# Altium PCB SensorBoardShield_Actuator.PcbDoc (part 1 of 2)
Units mil, origin at the board's own origin, x right, y up, seen from the top; angles counter-clockwise.
Board outline 3258.19 x 2440.94 mil, 4 copper layers (Top Layer, GND, PWR, Bottom Layer), stack 22.373 mil thick; 64 components, 36 nets, 228 pads, 1194 vias.
Unrouted connection lines stored in the file: 70.
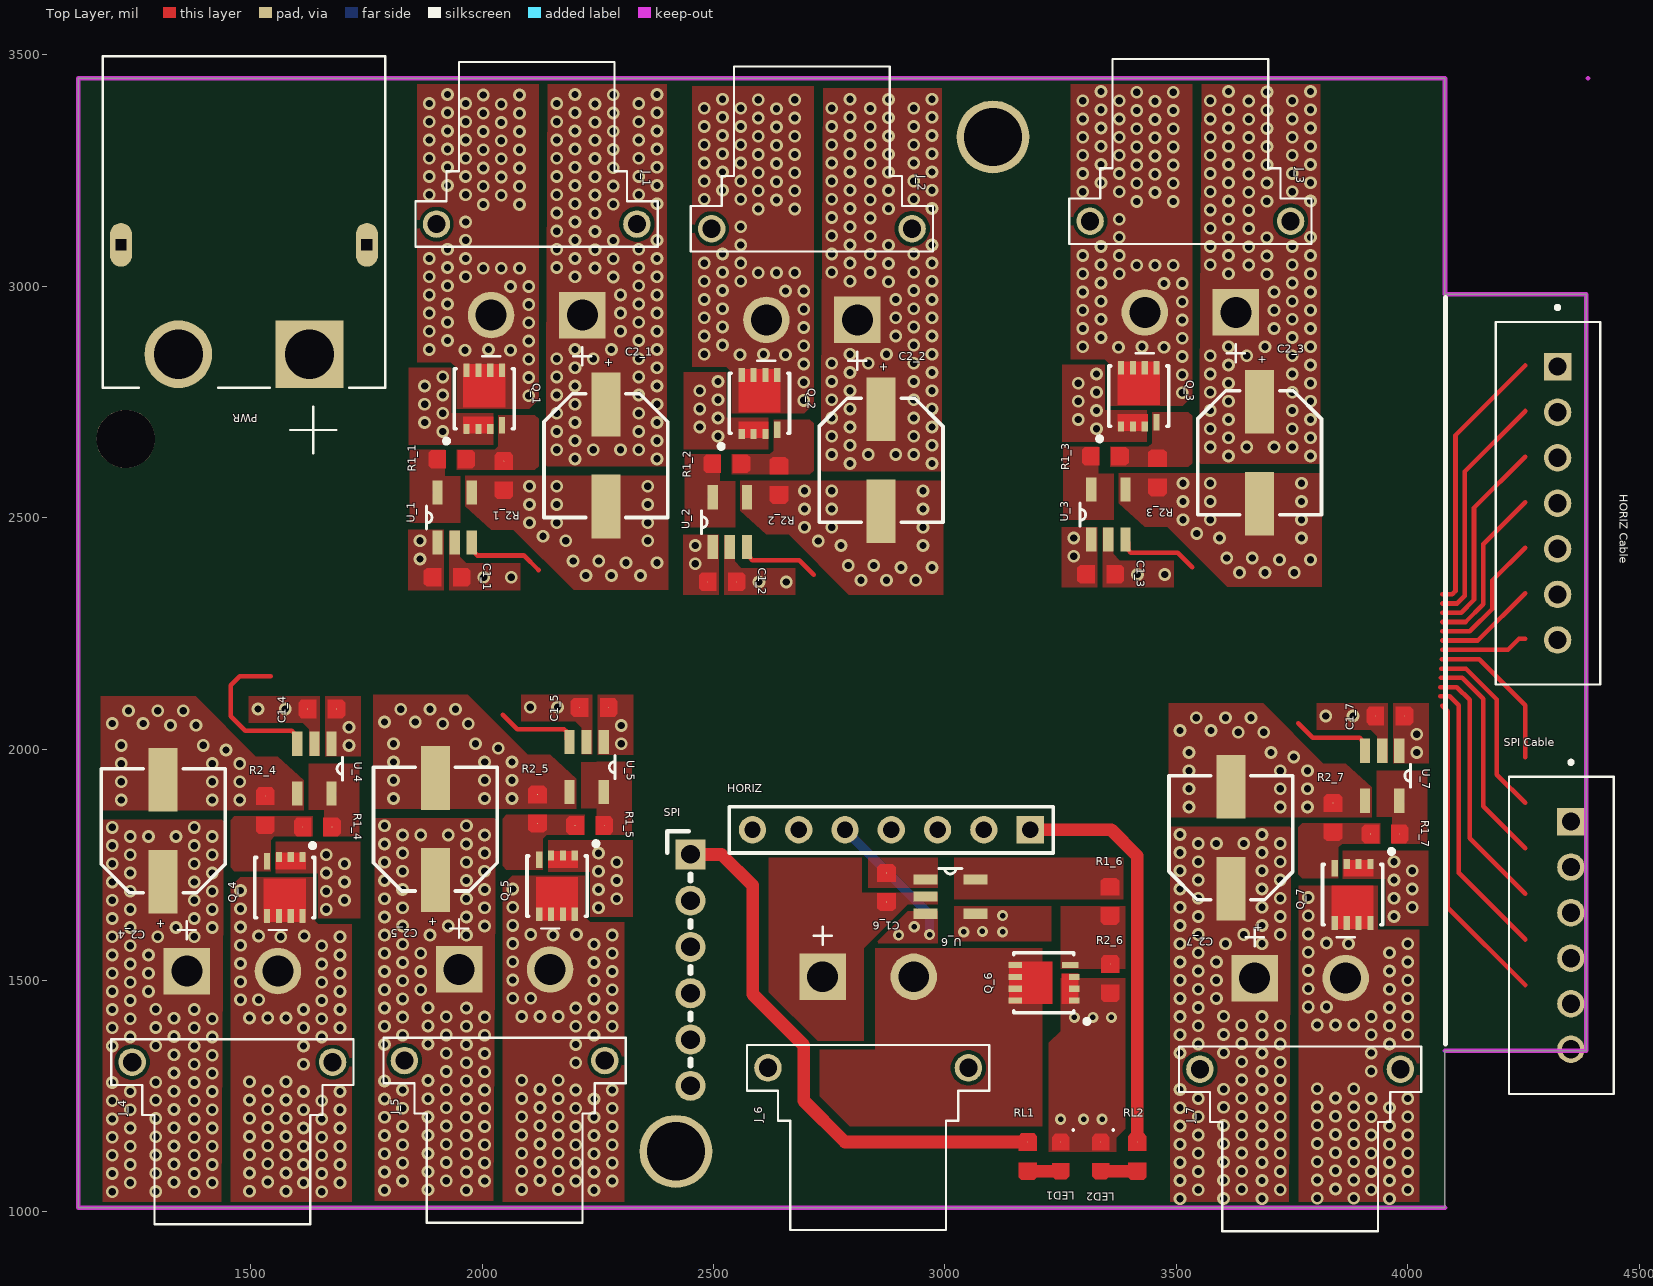
[diagram p0: Top Layer view]
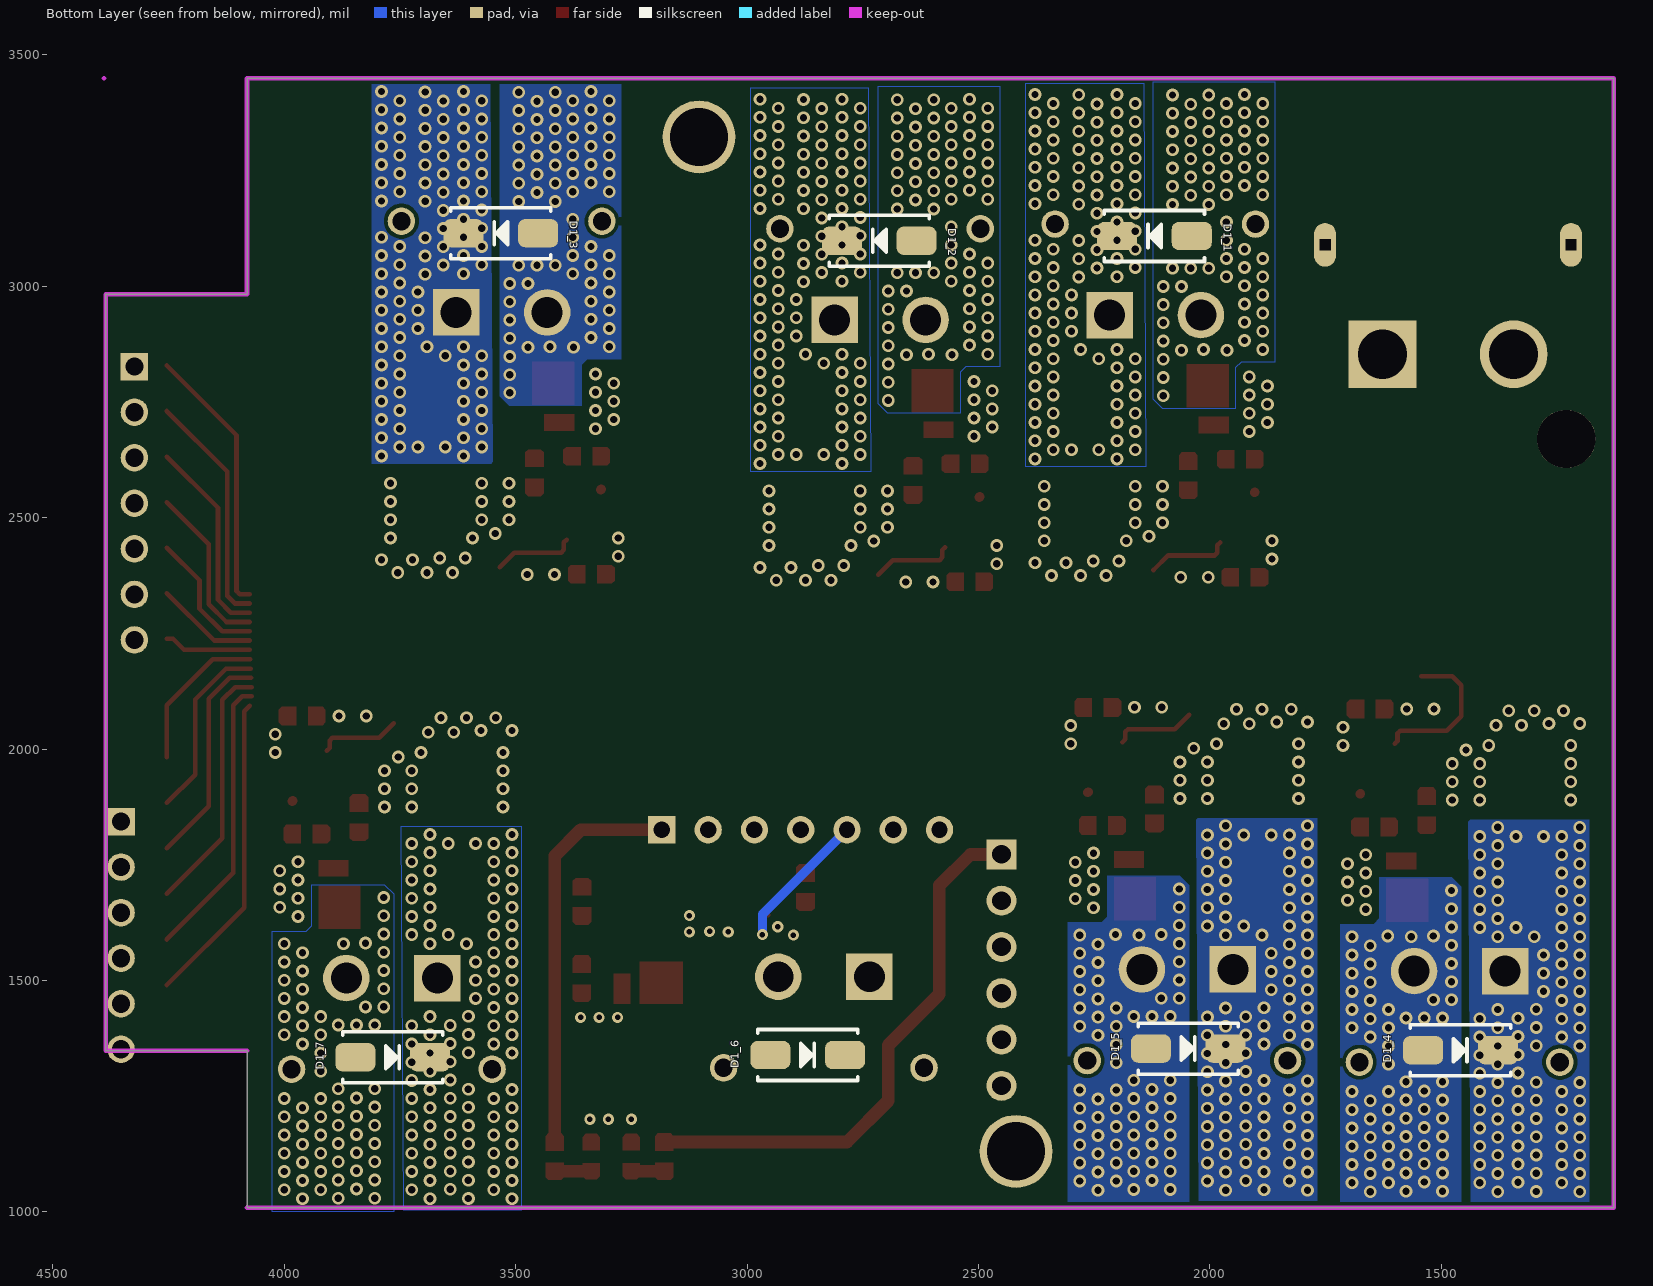
[diagram p1: Bottom Layer view, seen from below]
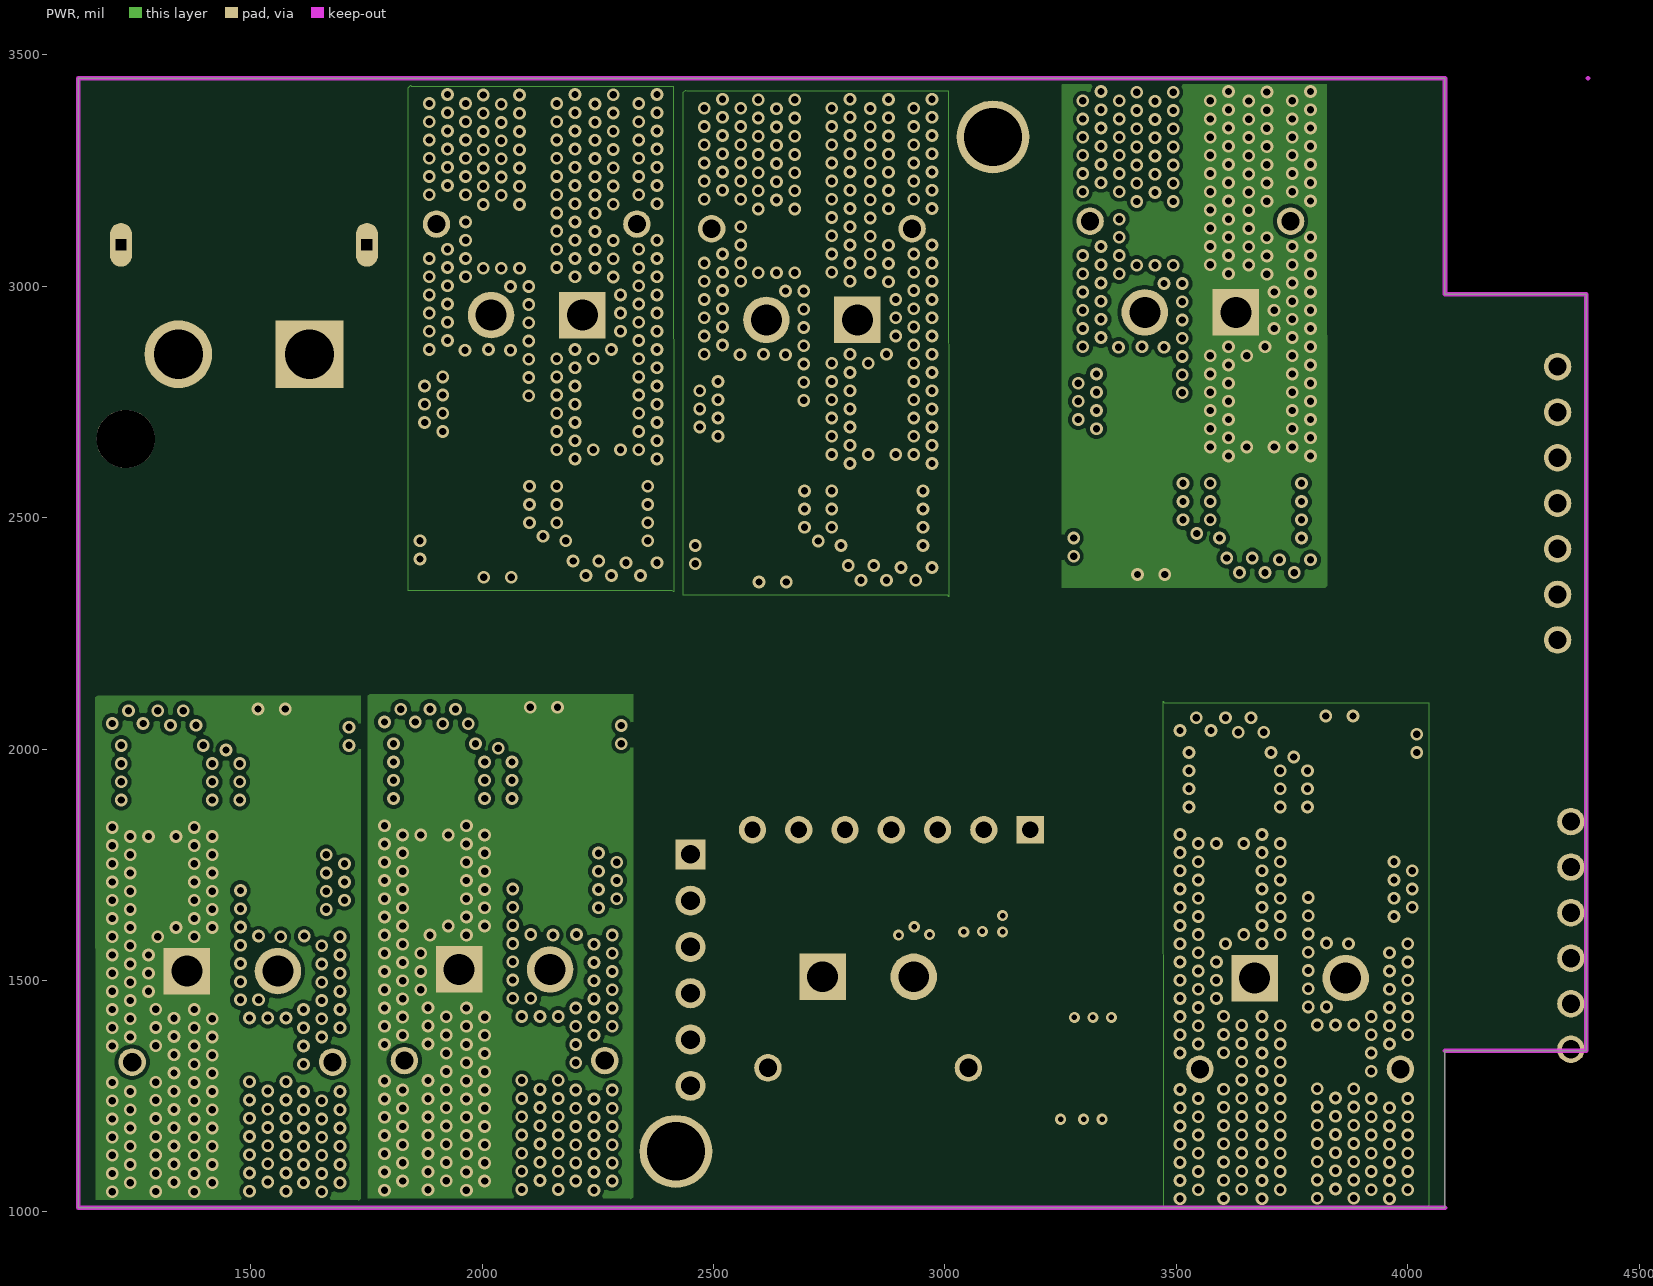
[diagram p2: PWR]

## Layer stack, top to bottom
Top Solder: solder mask 0.4, Solder Resist, Dk 3.5
Top Layer: signal copper 1.378
Dielectric 2: prepreg 2.8, PP-006, Dk 4.1
GND: signal copper 0.7087
Dielectric 1: dielectric 12.6, FR-4, Dk 4.8
PWR: signal copper 0.7087
Dielectric 3: prepreg 2.8, PP-006, Dk 4.1
Bottom Layer: signal copper 1.378
Bottom Solder: solder mask 0.4, Solder Resist, Dk 3.5

## Board outline
1127.64,1008.58 1127.64,3449.53 4080.71,3449.53 4080.71,2982.28 4385.83,2982.28 4385.83,1348.43 4080.71,1348.43 4080.71,1008.58

## Design rules (kind name [scope] priority, off if disabled: settings)
Clearance [All] p1: gap=8 ignorepadtopadclearanceinfootprint=FALSE
PolygonConnect [All] p1: connectstyle=Direct reliefconductorwidth=10 reliefentries=4 polygonreliefangle="90 Angle" airgapwidth=10
RoomDefinition 6 [InComponentClass('6')] p1: confinementstyle=ConfineIn formatcopy=FALSE lockcomponents=FALSE outline 3114.41,2132.23 2537.24,2132.23 2537.24,948.1 3114.41,948.1
RoomDefinition 2 [InComponentClass('2')] p2: confinementstyle=ConfineIn formatcopy=FALSE lockcomponents=FALSE outline 2432.68,2328.69 3009.84,2328.69 3009.84,3489.2 2432.68,3489.2
RoomDefinition 3 [InComponentClass('3')] p3: confinementstyle=ConfineIn formatcopy=FALSE lockcomponents=FALSE outline 3250.47,2344.96 3827.64,2344.96 3827.64,3505.47 3250.47,3505.47
RoomDefinition 1 [InComponentClass('1')] p4: confinementstyle=ConfineIn formatcopy=TRUE lockcomponents=FALSE outline 1838.19,2338.78 2415.35,2338.78 2415.35,3499.29 1838.19,3499.29
RoomDefinition 4 [InComponentClass('4')] p5: confinementstyle=ConfineIn formatcopy=TRUE lockcomponents=TRUE outline 1740.55,2118.9 1163.39,2118.9 1163.39,958.38 1740.55,958.38
RoomDefinition 7 [InComponentClass('7')] p6: confinementstyle=ConfineIn formatcopy=FALSE lockcomponents=FALSE outline 4047.8,2103.74 3470.63,2103.74 3470.63,943.23 4047.8,943.23
RoomDefinition 5 [InComponentClass('5')] p7: confinementstyle=ConfineIn formatcopy=FALSE lockcomponents=FALSE outline 2328.82,2122.34 1751.65,2122.34 1751.65,961.83 2328.82,961.83
RoutingVias [All] p1: holewidth=12 width=24 viastyle="Through Hole" minholewidth=10 minwidth=20 maxholewidth=28 maxwidth=50
SolderMaskExpansion [All] p1: expansion=4 istentingtop=FALSE
SupplyNets "Schematic Supply Nets_3" [InNet('GND')] p1: voltage=0.000
SupplyNets "Schematic Supply Nets_2" [InNet('+5V')] p2: voltage=0.000
SupplyNets "Schematic Supply Nets_1" [InNet('VCC-12V')] p3: voltage=0.000
SupplyNets "Schematic Supply Nets" [InNet('+5')] p4: voltage=0.000
Width [All] p1: maxlimit=59.06 minlimit=10 preferedwidth=20 toplayer_maxwidth=50 midlayer1_prefwidth=10 midlayer2_prefwidth=10 bottomlayer_maxwidth=50 minimp=50.000000 maximp=50.000000 favimp=50.000000
30 further rules are at their usual default settings.

## Classes and differential pairs
component class 7: C1_7 C2_7 D1_7 J_7 Q_7 R1_7 R2_7 U_7
component class 6: C1_6 D1_6 J_6 Q_6 R1_6 R2_6 U_6
component class 5: C1_5 C2_5 D1_5 J_5 Q_5 R1_5 R2_5 U_5
component class 4: C1_4 C2_4 D1_4 J_4 Q_4 R1_4 R2_4 U_4
component class 3: C1_3 C2_3 D1_3 J_3 Q_3 R1_3 R2_3 U_3
component class 2: C1_2 C2_2 D1_2 J_2 Q_2 R1_2 R2_2 U_2
component class 1: C1_1 C2_1 D1_1 J_1 Q_1 R1_1 R2_1 U_1
channel class mosfetsema: 1 2 3 4 5 6 7
component class SensorBoardShield_Actuator: HORIZ "HORIZ Cable" LED1 LED2 PWR RL1 RL2 SPI "SPI Cable"

## Components (designator, comment, footprint, x,y, rotation, side; value= is the part's Value field where it differs from the comment)
C1_1 "100nf" CAP_0603 1924.57,2371.26 r0 top (schematic designator C1)
C1_2 "100nf" CAP_0603 2519.06,2361.17 r0 top (schematic designator C1)
C1_3 "100nf" CAP_0603 3336.85,2377.44 r0 top (schematic designator C1)
C1_4 "100nf" CAP_0603 1654.17,2086.42 r180 top (schematic designator C1)
C1_5 "100nf" CAP_0603 2242.44,2089.86 r180 top (schematic designator C1)
C1_6 "100nf" CAP_0603 2874.02,1700.79 r270 top (schematic designator C1)
C1_7 "100nf" CAP_0603 3961.42,2071.26 r180 top (schematic designator C1)
C2_1 "100uF" WCAP-ASLI_D6.3H5.5 2267.72,2634.06 r90 top (schematic designator C2)
C2_2 "100uF" WCAP-ASLI_D6.3H5.5 2862.2,2623.97 r90 top (schematic designator C2)
C2_3 "100uF" WCAP-ASLI_D6.3H5.5 3680,2640.24 r90 top (schematic designator C2)
C2_4 "100uF" WCAP-ASLI_D6.3H5.5 1311.02,1823.62 r270 top (schematic designator C2)
C2_5 "100uF" WCAP-ASLI_D6.3H5.5 1899.29,1827.07 r270 top (schematic designator C2)
C2_7 "100uF" WCAP-ASLI_D6.3H5.5 3618.27,1808.46 r270 top (schematic designator C2)
D1_1 "SK34" DO214AC 2120.08,3108.47 r180 bottom (schematic designator D1)
D1_2 "SK34" DO214AC 2714.57,3098.38 r180 bottom (schematic designator D1)
D1_3 "SK34" DO214AC 3532.36,3114.65 r180 bottom (schematic designator D1)
D1_4 "SK34" DO214AC 1458.66,1349.21 r0 bottom (schematic designator D1)
D1_5 "SK34" DO214AC 2046.93,1352.66 r0 bottom (schematic designator D1)
D1_6 "SK34" DO214AC 2869.17,1338.93 r0 bottom (schematic designator D1)
D1_7 "SK34" DO214AC 3765.91,1334.05 r0 bottom (schematic designator D1)
HORIZ "HEADER_1x7" HDR1X7 3184.33,1825.51 r180 top locked
"HORIZ Cable" "B7B-XH-A(LF)(SN)" JST_B7B-XH-A(LF)(SN) 4303.33,2531 r90 top
J_1 "XT30PW-F" AMASS_XT30PW-F 2118.19,3134.29 r0 top (schematic designator J)
J_2 "XT30PW-F" AMASS_XT30PW-F 2712.68,3124.2 r0 top (schematic designator J)
J_3 "XT30PW-F" AMASS_XT30PW-F 3530.47,3140.47 r0 top (schematic designator J)
J_4 "XT30PW-F" AMASS_XT30PW-F 1460.55,1323.38 r180 top (schematic designator J)
J_5 "XT30PW-F" AMASS_XT30PW-F 2048.82,1326.83 r180 top (schematic designator J)
J_6 "XT30PW-F" AMASS_XT30PW-F 2834.41,1311.13 r180 top locked (schematic designator J)
J_7 "XT30PW-F" AMASS_XT30PW-F 3767.8,1308.23 r180 top (schematic designator J)
LED1 "GREEN LED" DIOC1608X04N 3250.32,1119.21 r90 top
LED2 "GREEN LED" DIOC1608X04N 3336.77,1119.21 r90 top
PWR "XT60 90 Deg" XT60PW-M 1485,3170 r0 top
Q_1 "IPZ40N04S5L-7R4" INF-PG-TSDSON-8-32-1-V 2004.92,2754.74 r90 top (schematic designator Q)
Q_2 "IPZ40N04S5L-7R4" INF-PG-TSDSON-8-32-1-V 2599.41,2744.65 r90 top (schematic designator Q)
Q_3 "IPZ40N04S5L-7R4" INF-PG-TSDSON-8-32-1-V 3419.17,2760.43 r90 top (schematic designator Q)
Q_4 "IPZ40N04S5L-7R4" INF-PG-TSDSON-8-32-1-V 1573.82,1702.94 r270 top (schematic designator Q)
Q_5 "IPZ40N04S5L-7R4" INF-PG-TSDSON-8-32-1-V 2162.09,1706.39 r270 top (schematic designator Q)
Q_6 "IPZ40N04S5L-7R4" INF-PG-TSDSON-8-32-1-V 3216.06,1494.91 r180 top (schematic designator Q)
Q_7 "IPZ40N04S5L-7R4" INF-PG-TSDSON-8-32-1-V 3881.06,1687.78 r270 top (schematic designator Q)
R1_1 "10R" RES_0603 1934.57,2626.26 r0 top (schematic designator R1)
R1_2 "10R" RES_0603 2529.06,2616.17 r0 top (schematic designator R1)
R1_3 "10R" RES_0603 3346.85,2632.44 r0 top (schematic designator R1)
R1_4 "10R" RES_0603 1644.17,1831.42 r180 top (schematic designator R1)
R1_5 "10R" RES_0603 2232.44,1834.86 r180 top (schematic designator R1)
R1_6 "10R" RES_0603 3357,1671 r270 top (schematic designator R1)
R1_7 "10R" RES_0603 3951.42,1816.26 r180 top (schematic designator R1)
R2_1 "4k7" RES_0603 2047.24,2590.75 r90 top (schematic designator R2)
R2_2 "4k7" RES_0603 2641.73,2580.66 r90 top (schematic designator R2)
R2_3 "4k7" RES_0603 3459.53,2596.93 r90 top (schematic designator R2)
R2_4 "4k7" RES_0603 1531.5,1866.93 r270 top (schematic designator R2)
R2_5 "4k7" RES_0603 2119.76,1870.37 r270 top (schematic designator R2)
R2_6 "4k7" RES_0603 3357.31,1503.94 r90 top (schematic designator R2)
R2_7 "4k7" RES_0603 3838.74,1851.77 r270 top (schematic designator R2)
RL1 "150" RES_0603 3179.29,1119.21 r90 top
RL2 "150" RES_0603 3415.51,1119.21 r90 top
SPI "HEADER_1x6" HM1X6 2450.47,1522.36 r270 top locked
"SPI Cable" "B6B-XH-A(LF)(SN)" JST_B6B-XH-A(LF)(SN) 4332.1,1597.28 r90 top
U_1 "MCP1416T-E/OT" SOT95P270X145-5N#1 1940.95,2500.2 r90 top (schematic designator U)
U_2 "MCP1416T-E/OT" SOT95P270X145-5N#1 2535.43,2490.11 r90 top (schematic designator U)
U_3 "MCP1416T-E/OT" SOT95P270X145-5N#1 3353.23,2506.38 r90 top (schematic designator U)
U_4 "MCP1416T-E/OT" SOT95P270X145-5N#1 1637.8,1957.48 r270 top (schematic designator U)
U_5 "MCP1416T-E/OT" SOT95P270X145-5N#1 2226.06,1960.93 r270 top (schematic designator U)
U_6 "MCP1416T-E/OT" SOT95P270X145-5N#2 3011.81,1681.1 r0 top (schematic designator U)
U_7 "MCP1416T-E/OT" SOT95P270X145-5N#1 3945.04,1942.32 r270 top (schematic designator U)

## Footprints (in the part's own frame and the unit in brackets; to place one, negate y for a bottom-side part, rotate by r counter-clockwise, add the part's x,y. Pads: shape width x height; smd on the part's side, far side on the other; paste and mask are expansions set on the pad)
AMASS_XT30PW-F [mm]
  round 2.55 hole 1.7: N(-2.5,-5)
  rect 2.55x2.55 hole 1.7: P(2.5,-5)
  round 1.508 hole 1: S1(5.5,0) S2(-5.5,0)
  silkscreen extent -6.65,-7.75 6.65,8.9, body extent -6.65,-6 6.65,8.9, height 5
CAP_0603 [mil] "Chip Capacitor, 2-Leads, Body 1.60x0.80mm, IPC Medium Density"
  round 1 smd: 1(-31.5,0) 2(31.5,0)
  Top Layer region: -50.2,-13.8 -50.2,13.8 -44.31,19.69 -12.8,19.69 -12.8,-19.69 -44.31,-19.69
  Top Layer region: 12.8,-19.69 12.8,19.69 44.31,19.69 50.2,13.8 50.2,-13.8 44.31,-19.69
  body extent -34,-19 34,19, height 31
DIOC1608X04N [mil] "Chip Diode, 2-Leads, Body 1.60x0.80mm, IPC Medium Density"
  round 1 smd: 1(-31.5,0) 2(31.5,0)
  Top Layer region: 13.78,-18.7 42.13,-18.7 49.21,-11.61 49.21,11.61 42.13,18.7 13.78,18.7
  Top Layer region: -49.21,-11.61 -42.13,-18.7 -13.78,-18.7 -13.78,18.7 -42.13,18.7 -49.21,11.61
  silkscreen extent 56,-29 60,-25, body extent -31,-16 31,16, height 31
DO214AC [mm]
  rrect50% 2.2x1.55 smd: 1(-2.05,0) 2(2.05,0)
  silkscreen extent -2.75,-1.4 2.75,1.4, body extent -2.75,-1.4 2.75,1.4, height 2.6
HDR1X7 [mm]
  rect 1.5x1.5 hole 0.9: 1(0,0)
  round 1.5 hole 0.9: 2(2.54,0) 3(5.08,0) 4(7.62,0) 5(10.16,0) 6(12.7,0) 7(15.24,0)
  silkscreen extent -1.27,-1.27 16.51,1.27
HM1X6 [mil]
  rect 65x65 hole 40: 1(-250,0)
  round 65 hole 40: 2(-150,0) 3(-50,0) 4(50,0) 5(150,0) 6(250,0)
  silkscreen extent -300,-50 207,0, body extent -300,-57 300,57, height 335
INF-PG-TSDSON-8-32-1-V [mm] "TSDSON 8, 0.65mm pitch; 8 pin,3.3mm W X 3.3mm L X 1.15 mm H body"
  rect 0.55x0.34 smd paste-0.45 mask+0: 1(-1.615,0.975) 2(-1.615,0.325) 3(-1.615,-0.325)
  rect 0.9x0.34 smd paste-0.9 mask+0: 4(-1.39,-0.975)
  rect 0.75x0.34 smd paste-0.65 mask+0: 5(1.615,-0.975) 6(1.615,-0.325) 7(1.615,0.325) 8(1.615,0.975)
  Top Layer region: -0.42,1.145 -0.42,-1.145 1.94,-1.145 1.94,1.145
  Top Layer region: -0.94,1.145 -1.84,1.145 -1.84,-0.495 -0.94,-0.495
  silkscreen extent -2.39,-1.65 1.71,2.2, body extent -1.59,-1.65 1.71,1.65, height 1.06
JST_B6B-XH-A(LF)(SN) [mm]
  rect 1.508x1.508 / inner round 1.508 / far side rect 1.508x1.508 hole 1: 1(6.25,-0.525)
  round 1.508 hole 1: 2(3.75,-0.525) 3(1.25,-0.525) 4(-1.25,-0.525) 5(-3.75,-0.525) 6(-6.25,-0.525)
  silkscreen extent -8.7,-2.88 9.6,2.88, body extent -8.7,-2.88 8.7,2.88, height 7
JST_B7B-XH-A(LF)(SN) [mm]
  rect 1.508x1.508 / inner round 1.508 / far side rect 1.508x1.508 hole 1: 1(7.5,-0.525)
  round 1.508 hole 1: 2(5,-0.525) 3(2.5,-0.525) 4(0,-0.525) 5(-2.5,-0.525) 6(-5,-0.525) 7(-7.5,-0.525)
  silkscreen extent -9.95,-2.88 10.85,2.88, body extent -9.95,-2.88 9.95,2.88, height 7
RES_0603 [mil] "Chip Resistor, 2-Leads, Body 1.60x0.80mm, IPC Medium Density"
  round 1 smd: 1(-31.5,0) 2(31.5,0)
  Top Layer region: -50.2,-13.8 -50.2,13.8 -44.31,19.69 -12.8,19.69 -12.8,-19.69 -44.31,-19.69
  Top Layer region: 12.8,-19.69 12.8,19.69 44.31,19.69 50.2,13.8 50.2,-13.8 44.31,-19.69
  body extent -31,-16 31,16, height 18
SOT95P270X145-5N#1 [mil]
  rect 52x22 smd: 1(-54,37) 2(-54,0) 3(-54,-37) 4(54,-37) 5(54,37)
  silkscreen extent -25,49 25,61, body extent -52,-57 54,57, height 57
SOT95P270X145-5N#2 [mil]
  rect 52x22 smd: 1(-54,37) 3(-54,-37) 4(54,-37) 5(54,37) ""(-54,0)
  silkscreen extent -25,49 25,61, body extent -52,-57 54,57, height 57
WCAP-ASLI_D6.3H5.5 [mm] "Aluminium Electrolytic V-Chip SMT Capacitors, 6.3x5.5mm"
  rect 3.5x1.6 smd: 1(2.8,0) 2(-2.8,0)
  silkscreen extent -3.4,-3.4 3.4,3.4, body extent -3.65,-3.3 3.65,3.3, height 5.5
XT60PW-M [mm] "XT60 90 Deg"
  round 3.716 hole 2.7: 1(-3.584,-8.048)
  rect 3.716x3.716 hole 2.7: 2(3.616,-8.048)
  oval 1.2x2.4 hole 0.6 square: S1(6.766,-2.048) S2(-6.734,-2.048)
  silkscreen extent -7.73,-13.48 7.77,8.3, body extent -7.73,-9.9 7.77,8.3, height 8.4

## Part data
C1_1 C1_2 C1_3 C1_4 C1_5 C1_6 C1_7: library part C000007, "CAP CER 100nF 0603 25V X7R", capaticanse=100nf, ComponentLink1Description=digikey, ComponentLink1URL=https://www.digikey.com/en/products/detail/kyocera-avx/06033C104K4T2A/8019250
C2_1 C2_2 C2_3 C2_4 C2_5 C2_7: library part 865080343009, "WCAP-ASLI Aluminum Electrolytic Capacitor, V-Chip, D6.3 x H5.5mm, 100uF, 16V", Capacitance Tolerance=+/-20%, Leakage Current=16uA, Manufacturer="Wurth Elektronik", Operating Temperature Max=105°C, Operating Temperature Min=-55°C, Rated Voltage (DC)=16V, Ripple Current=255mA, capacitance=100uF, Category="Aluminum Electrolytic Capacitors", ComponentLink1Description="Website Link", ComponentLink1URL=https://www.we-online.com/redexpert/article/865080343009?ad, ComponentLink2Description="Datasheet Link", ComponentLink2URL=https://www.we-online.com/redexpert/spec/865080343009?ad, Diameter=6.3mm, Dissipation Factor=16%, Endurance=2000h, Height=5.5mm, Manufacturer Part Number=865080343009, Match Code=WCAP-ASLI, Mount="Surface Mount", Packaging="Tape and Reel", Technical Reference=ASED055101M016DVCTBB000
D1_1 D1_2 D1_3 D1_4 D1_5 D1_6 D1_7: "DIODE SCHOTTKY 40V 3A DO214AC", Current  Average Rectified=3A, Manufacturer="Vishay Semiconductor Diodes Division", Package Case="DO-214AC, SMA", Recommended Rating=Silver, Voltage  DC Reverse=40V, Voltage  Forward="550mV @ 3A", Assembly=SMD, Barcode=0100000007488, Category="Discrete Semiconductor Products", Datasheet URL=http://www.vishay.com/docs/88896/b330la.pdf, Diode Type=Schottky, Family=DIODE, id=62, item_id=1025, Manufacturer Part Number=SK34, Part Type="Discrete Semiconductors", Speed="Fast Recovery =< 500ns, > 200mA (Io)"
HORIZ: library part "Header 7", "Header, 7-Pin", LatestRevisionDate=17-Jul-2002, LatestRevisionNote="Re-released for DXP Platform.", Publisher="Altium Limited"
"HORIZ Cable": "Connector Header Through Hole 7 position 0.098 (2.50mm)", Package=None, Check_prices=https://www.snapeda.com/parts/B7B-XH-A%20(LF)(SN)/JST+Sales+America+Inc./view-part/?ref=eda, MF="JST Sales", MP="B7B-XH-A (LF)(SN)", SnapEDA_Link=https://www.snapeda.com/parts/B7B-XH-A%20(LF)(SN)/JST+Sales+America+Inc./view-part/?ref=snap
J_1 J_2 J_3 J_4 J_5 J_6 J_7: Package=None, Availability=Unavailable, MF="{'manufacturer': u'amass'}", MP=XT30PW-F, Price=None
LED1 LED2: library part 00000001, "LED GREEN DIFFUSED 0603 SMD", Supplier Part Number 1=Q65111A3964, ComponentLink1Description=Digikey, ComponentLink1URL=https://www.digikey.com/en/products/detail/ams-osram-usa-inc/LG-Q396-PS-35/5249855, Supplier 1=Avnet
PWR: library part XT60PW-M
Q_1 Q_2 Q_3 Q_4 Q_5 Q_6 Q_7: "Insulated-Gate Field-Effect Transistor (IGFET), N-Channel, Enhancement, Body Diode, Pin 1 Source, 2 Source, 3 Source, 4 Gate, 5 Drain, 6 Drain, 7 Drain, 8 Drain, 8 Pins", Manufacturer="Infineon Technologies", ManufacturerPartNumber=IPZ40N04S5L-7R4, PackageReference=PG-TSDSON-8-32
R1_1 R1_2 R1_3 R1_4 R1_5 R1_6 R1_7: library part R000004, "RES 10 OHM 1% 1/10W 0603", resistance=1Kohm, ComponentLink1Description=digikey, ComponentLink1URL=https://www.digikey.com/en/products/detail/vishay-beyschlag-draloric-bc-components/MCT06030C1001FP500/2607821
R2_1 R2_2 R2_3 R2_4 R2_5 R2_6 R2_7: library part R000004, "RES 4k7 OHM 1% 1/10W 0603", resistance=1Kohm, ComponentLink1Description=digikey, ComponentLink1URL=https://www.digikey.com/en/products/detail/vishay-beyschlag-draloric-bc-components/MCT06030C1001FP500/2607821
RL1 RL2: library part R000004, "RES 150 OHM 1% 1/10W 0603", resistance=1Kohm, ComponentLink1Description=digikey, ComponentLink1URL=https://www.digikey.com/en/products/detail/vishay-beyschlag-draloric-bc-components/MCT06030C1001FP500/2607821
"SPI Cable": "Connector Header Through Hole 6 position 0.098 (2.50mm)", Package=None, Check_prices=https://www.snapeda.com/parts/B6B-XH-A(LF)(SN)/JST+Sales+America+Inc./view-part/?ref=eda, MF="JST Sales", MP=B6B-XH-A(LF)(SN), SnapEDA_Link=https://www.snapeda.com/parts/B6B-XH-A(LF)(SN)/JST+Sales+America+Inc./view-part/?ref=snap
U_1 U_2 U_3 U_4 U_5 U_6 U_7: "Low-Side Gate Driver IC Non-Inverting SOT-23-5", Package="SOT-23-5 Microchip", Availability=Good, Check_prices=https://www.snapeda.com/parts/MCP1416T-E/OT/Microchip/view-part/287469/?ref=eda, MF=Microchip, MP=MCP1416T-E/OT, Price=None, Purchase-URL=https://pricing.snapeda.com/search/part/MCP1416T-E/OT/?ref=eda, SnapEDA_Link=https://www.snapeda.com/parts/MCP1416T-E/OT/Microchip/view-part/287469/?ref=snap

## Free pads (board coordinates)
  round 125.98 hole 125.98: ""(1230,2670)
  round 157.48 hole 125.98: ""(2418.98,1130.63) ""(3104.02,3322.56)

## Via types
v1: diameter 27.56, hole 15.75, Top Layer to Bottom Layer, 1181 vias
v2: diameter 24, hole 12, Top Layer to Bottom Layer, 13 vias

## Nets (pads, with @x,y where several pads share a name; then routed paths per layer and width w, separated by ;. In a path a pad name is that pad's centre, name@x,y a point inside that pad or via, vN(x,y) a via of type N, cw(c..) or ccw(c..) an arc to the next point about the centre after c; other vN are vias at no path point)
+5: "HORIZ Cable.1" HORIZ.1 RL2.2 | length 1453.9
  Top Layer w10: 4075.12,2334.57 4096.38,2334.57 4103.39,2341.57 4103.39,2678.19 4253.94,2828.74
  Top Layer w27.56: HORIZ.1@3184.33,1825.51 3359.49,1825.51 3415.51,1769.49 RL2.2@3415.51,1150.71
+5V: "SPI Cable.1" RL1.2 SPI.1 | length 1528.2
  Top Layer w10: 4073.38,2193.86 4154.57,2193.86 4253.94,2094.49 4253.94,1982.28
  Top Layer w27.56: SPI.1@2450.47,1772.36 2517.64,1772.36 2585,1705 2585,1470 2695,1360 2695,1240 2784.29,1150.71 RL1.2@3179.29,1150.71
GND: "HORIZ Cable.2" "SPI Cable.6" C1_1.1 C1_2.1 C1_3.1 C1_4.1 C1_5.1 C1_6.1 C1_7.1 C2_1.2 C2_2.2 C2_3.2 C2_4.2 C2_5.2 C2_7.2 HORIZ.2 LED1.2 LED2.2 PWR.1 Q_1.1 Q_1.2 Q_1.3 Q_2.1 Q_2.2 Q_2.3 Q_3.1 Q_3.2 Q_3.3 Q_4.1 Q_4.2 Q_4.3 Q_5.1 Q_5.2 Q_5.3 Q_6.1 Q_6.2 Q_6.3 Q_7.1 Q_7.2 Q_7.3 R2_1.1 R2_2.1 R2_3.1 R2_4.1 R2_5.1 R2_6.1 R2_7.1 SPI.6 U_1.1 U_1.4 U_2.1 U_2.4 U_3.1 U_3.4 U_4.1 U_4.4 U_5.1 U_5.4 U_6.1 U_6.4 U_7.1 U_7.4 | length 1186.7
  Top Layer w10: 4074.8,2093.79 4086.61,2081.98 4086.61,1657.48 4253.94,1490.16 ; 4074.8,2314.57 4107.15,2314.57 4123.39,2330.8 4123.39,2599.76 4253.94,2730.32
  other v1: 3970.63,1638.39 1663.39,1653.54 2251.65,1656.99 4010,1658.07 1702.76,1673.23 2291.02,1676.67 3970.63,1677.76 1663.39,1692.91 2251.65,1696.36 4010,1697.44 1702.76,1712.6 2291.02,1716.04 3970.63,1717.13 1663.39,1732.28 2251.65,1735.73 4010,1736.81 1702.76,1751.97 2291.02,1755.41 3970.63,1756.5 1663.39,1771.65 2251.65,1775.1 3527.72,1874.61 3724.57,1874.61 3783.62,1874.61 1220.47,1889.76 1417.32,1889.76 1476.38,1889.76 1808.74,1893.21 2005.59,1893.21 2064.65,1893.21 3527.72,1913.98 3724.57,1913.98 3783.62,1913.98 1220.47,1929.13 1417.32,1929.13 1476.38,1929.13 1808.74,1932.58 2005.59,1932.58 2064.65,1932.58 3527.72,1953.35 3724.57,1953.35 3783.62,1953.35 1220.47,1968.5 1417.32,1968.5 1476.38,1968.5 1808.74,1971.95 2005.59,1971.95 2064.65,1971.95 3754.09,1982.87 3527.72,1992.72 3704.88,1992.72 4019.84,1992.72 1446.85,1998.03 2035.12,2001.48 1220.47,2007.87 1397.64,2007.87 1712.6,2007.87 1808.74,2011.32 1985.91,2011.32 2300.87,2011.32 4019.84,2032.09 3634.02,2036.02 3689.13,2036.02 3508.03,2039.96 3574.96,2039.96 1712.6,2047.24 1326.77,2051.18 1381.89,2051.18 2300.87,2050.69 1200.79,2055.12 1267.72,2055.12 1915.04,2054.63 1970.16,2054.63 1789.06,2058.56 1855.98,2058.56 3543.46,2067.52 3606.46,2067.52 3661.57,2067.52 1236.22,2082.68 1299.21,2082.68 1354.33,2082.68 1824.49,2086.12 1887.48,2086.12 1942.6,2086.12 2818.9,2364.91 2874.02,2364.91 2937.01,2364.91 2224.41,2375 2279.53,2375 2342.52,2375 3636.69,2381.18 3691.81,2381.18 3754.8,2381.18 2905.51,2392.47 2972.44,2392.47 2791.34,2396.41 2846.46,2396.41 2460.63,2400.34 2311.02,2402.56 2377.95,2402.56 2196.85,2406.5 2251.97,2406.5 3723.31,2408.74 3790.24,2408.74 1866.14,2410.43 3609.13,2412.68 3664.25,2412.68 3278.43,2416.61 2460.63,2439.71 2775.59,2439.71 2952.76,2439.71 1866.14,2449.8 2181.1,2449.8 2358.27,2449.8 2726.38,2449.56 3278.43,2455.98 3593.39,2455.98 3770.55,2455.98 2131.89,2459.65 3544.17,2465.83 2696.85,2479.08 2755.91,2479.08 2952.76,2479.08 2102.36,2489.17 2161.42,2489.17 2358.27,2489.17 3514.65,2495.35 3573.7,2495.35 3770.55,2495.35 2696.85,2518.45 2755.91,2518.45 2952.76,2518.45 2102.36,2528.54 2161.42,2528.54 2358.27,2528.54 3514.65,2534.72 3573.7,2534.72 3770.55,2534.72 2696.85,2557.82 2755.91,2557.82 2952.76,2557.82 2102.36,2567.91 2161.42,2567.91 2358.27,2567.91 3514.65,2574.09 3573.7,2574.09 3770.55,2574.09 2509.84,2675.93 1915.35,2686.02 3327.64,2692.2 2470.47,2695.62 1875.98,2705.71 3288.27,2711.89 2509.84,2715.3 1915.35,2725.39 3327.64,2731.57 2470.47,2734.99 1875.98,2745.08 3288.27,2751.26 2509.84,2754.67 1915.35,2764.76 3327.64,2770.94 2470.47,2774.36 1875.98,2784.45 3288.27,2790.63 2509.84,2794.04 1915.35,2804.13 3327.64,2810.31
  other v2: 3250,1200 3300,1200 3340,1200 3280,1420 3320,1420 3360,1420 3041,1605 3125,1605 3081,1606 3125,1640
NetD1_1_2: D1_1.2 J_1.N Q_1.5 Q_1.6 Q_1.7 Q_1.8 | length 3.8
  Top Layer w50: J_1.N@2017.09,2934.76 J_1.N@2019.76,2937.44
  other v1: 2100.83,2763.43 2100.83,2802.8 2100.83,2842.17 1963.03,2861.85 2061.46,2861.85 1885.83,2863.19 2013.78,2863.19 2100.83,2881.54 1925.2,2882.87 1885.83,2902.56 2100.83,2920.91 1925.2,2922.24 1885.83,2941.93 2100.83,2960.28 1925.2,2961.61 1885.83,2981.3 2061.46,2999.65 2100.83,2999.65 1925.2,3000.98 1885.83,3020.67 1964.57,3020.67 2002.4,3039.02 2041.77,3039.02 2081.14,3039.02 1925.2,3040.35 1885.83,3060.04 1964.57,3060.04 1925.2,3079.72 1964.57,3099.41 1964.57,3138.78 2002.4,3176.81 2081.14,3176.81 2041.77,3196.5 1885.83,3197.83 1964.57,3197.83 2002.4,3216.18 2081.14,3216.18 1925.2,3217.52 2041.77,3235.87 1885.83,3237.2 1964.57,3237.2 2002.4,3255.55 2081.14,3255.55 1925.2,3256.89 2041.77,3275.24 1885.83,3276.57 1964.57,3276.57 2002.4,3294.92 2081.14,3294.92 1925.2,3296.26 2041.77,3314.61 1885.83,3315.94 1964.57,3315.94 2002.4,3334.29 2081.14,3334.29 1925.2,3335.63 2041.77,3353.98 1885.83,3355.32 1964.57,3355.32 2002.4,3373.66 2081.14,3373.66 1925.2,3375 2041.77,3393.35 1885.83,3394.69 1964.57,3394.69 2002.4,3413.03 2081.14,3413.03 1925.2,3414.37
NetD1_2_2: D1_2.2 J_2.N Q_2.5 Q_2.6 Q_2.7 Q_2.8 | length 3.8
  Top Layer w50: J_2.N@2611.57,2924.68 J_2.N@2614.25,2927.35
  other v1: 2695.31,2753.34 2695.31,2792.71 2695.31,2832.08 2557.52,2851.76 2655.94,2851.76 2480.31,2853.1 2608.27,2853.1 2695.31,2871.45 2519.68,2872.78 2480.31,2892.47 2695.31,2910.82 2519.68,2912.16 2480.31,2931.84 2695.31,2950.19 2519.68,2951.53 2480.31,2971.21 2655.94,2989.56 2695.31,2989.56 2519.68,2990.9 2480.31,3010.58 2559.06,3010.58 2596.89,3028.93 2636.26,3028.93 2675.63,3028.93 2519.68,3030.27 2480.31,3049.95 2559.06,3049.95 2519.68,3069.64 2559.06,3089.32 2559.06,3128.69 2596.89,3166.72 2675.63,3166.72 2636.26,3186.41 2480.31,3187.75 2559.06,3187.75 2596.89,3206.09 2675.63,3206.09 2519.68,3207.43 2636.26,3225.78 2480.31,3227.12 2559.06,3227.12 2596.89,3245.46 2675.63,3245.46 2519.68,3246.8 2636.26,3265.15 2480.31,3266.49 2559.06,3266.49 2596.89,3284.83 2675.63,3284.83 2519.68,3286.17 2636.26,3304.52 2480.31,3305.86 2559.06,3305.86 2596.89,3324.2 2675.63,3324.2 2519.68,3325.54 2636.26,3343.89 2480.31,3345.23 2559.06,3345.23 2596.89,3363.57 2675.63,3363.57 2519.68,3364.91 2636.26,3383.26 2480.31,3384.6 2559.06,3384.6 2596.89,3402.94 2675.63,3402.94 2519.68,3404.28
NetD1_3_2: D1_3.2 J_3.N Q_3.5 Q_3.6 Q_3.7 Q_3.8 | length 3.8
  Top Layer w50: J_3.N@3429.37,2940.94 J_3.N@3432.05,2943.62
  other v1: 3513.11,2769.61 3513.11,2808.98 3513.11,2848.35 3375.31,2868.03 3473.74,2868.03 3298.11,2869.37 3426.06,2869.37 3513.11,2887.72 3337.48,2889.05 3298.11,2908.74 3513.11,2927.09 3337.48,2928.42 3298.11,2948.11 3513.11,2966.46 3337.48,2967.79 3298.11,2987.48 3473.74,3005.83 3513.11,3005.83 3337.48,3007.16 3298.11,3026.85 3376.85,3026.85 3414.68,3045.2 3454.05,3045.2 3493.42,3045.2 3337.48,3046.53 3298.11,3066.22 3376.85,3066.22 3337.48,3085.9 3376.85,3105.59 3376.85,3144.96 3414.68,3182.99 3493.42,3182.99 3454.05,3202.68 3298.11,3204.01 3376.85,3204.01 3414.68,3222.36 3493.42,3222.36 3337.48,3223.7 3454.05,3242.05 3298.11,3243.38 3376.85,3243.38 3414.68,3261.73 3493.42,3261.73 3337.48,3263.07 3454.05,3281.42 3298.11,3282.75 3376.85,3282.75 3414.68,3301.1 3493.42,3301.1 3337.48,3302.44 3454.05,3320.79 3298.11,3322.12 3376.85,3322.12 3414.68,3340.47 3493.42,3340.47 3337.48,3341.81 3454.05,3360.16 3298.11,3361.49 3376.85,3361.49 3414.68,3379.84 3493.42,3379.84 3337.48,3381.18 3454.05,3399.53 3298.11,3400.86 3376.85,3400.86 3414.68,3419.21 3493.42,3419.21 3337.48,3420.55
NetD1_4_2: D1_4.2 J_4.N Q_4.5 Q_4.6 Q_4.7 Q_4.8 | length 3.8
  Top Layer w50: J_4.N@1558.98,1520.23 J_4.N@1561.65,1522.91
  other v1: 1653.54,1043.31 1497.6,1044.64 1576.34,1044.64 1614.17,1062.99 1692.91,1062.99 1536.97,1064.33 1653.54,1082.68 1497.6,1084.01 1576.34,1084.01 1614.17,1102.36 1692.91,1102.36 1536.97,1103.7 1653.54,1122.05 1497.6,1123.38 1576.34,1123.38 1614.17,1141.73 1692.91,1141.73 1536.97,1143.07 1653.54,1161.42 1497.6,1162.75 1576.34,1162.75 1614.17,1181.1 1692.91,1181.1 1536.97,1182.44 1653.54,1200.79 1497.6,1202.12 1576.34,1202.12 1614.17,1220.47 1692.91,1220.47 1536.97,1221.81 1653.54,1240.16 1497.6,1241.49 1576.34,1241.49 1614.17,1259.84 1692.91,1259.84 1536.97,1261.18 1497.6,1280.86 1576.34,1280.86 1614.17,1318.9 1614.17,1358.27 1653.54,1377.95 1614.17,1397.64 1692.91,1397.64 1653.54,1417.32 1497.6,1418.66 1536.97,1418.66 1576.34,1418.66 1614.17,1437.01 1692.91,1437.01 1653.54,1456.69 1477.91,1458.03 1517.28,1458.03 1692.91,1476.38 1653.54,1496.06 1477.91,1497.4 1692.91,1515.75 1653.54,1535.43 1477.91,1536.77 1692.91,1555.12 1653.54,1574.8 1477.91,1576.14 1564.96,1594.49 1692.91,1594.49 1517.28,1595.82 1615.71,1595.82 1477.91,1615.51 1477.91,1654.88 1477.91,1694.25
NetD1_5_2: D1_5.2 J_5.N Q_5.5 Q_5.6 Q_5.7 Q_5.8 | length 3.8
  Top Layer w50: J_5.N@2147.24,1523.68 J_5.N@2149.92,1526.36
  other v1: 2241.81,1046.75 2085.87,1048.09 2164.61,1048.09 2202.44,1066.44 2281.18,1066.44 2125.24,1067.77 2241.81,1086.12 2085.87,1087.46 2164.61,1087.46 2202.44,1105.81 2281.18,1105.81 2125.24,1107.14 2241.81,1125.49 2085.87,1126.83 2164.61,1126.83 2202.44,1145.18 2281.18,1145.18 2125.24,1146.52 2241.81,1164.86 2085.87,1166.2 2164.61,1166.2 2202.44,1184.55 2281.18,1184.55 2125.24,1185.89 2241.81,1204.23 2085.87,1205.57 2164.61,1205.57 2202.44,1223.92 2281.18,1223.92 2125.24,1225.26 2241.81,1243.6 2085.87,1244.94 2164.61,1244.94 2202.44,1263.29 2281.18,1263.29 2125.24,1264.63 2085.87,1284.31 2164.61,1284.31 2202.44,1322.34 2202.44,1361.71 2241.81,1381.4 2202.44,1401.08 2281.18,1401.08 2241.81,1420.77 2085.87,1422.11 2125.24,1422.11 2164.61,1422.11 2202.44,1440.45 2281.18,1440.45 2241.81,1460.14 2066.18,1461.48 2105.55,1461.48 2281.18,1479.82 2241.81,1499.51 2066.18,1500.85 2281.18,1519.19 2241.81,1538.88 2066.18,1540.22 2281.18,1558.56 2241.81,1578.25 2066.18,1579.59 2153.23,1597.93 2281.18,1597.93 2105.55,1599.27 2203.98,1599.27 2066.18,1618.96 2066.18,1658.33 2066.18,1697.7
NetD1_6_2: D1_6.2 J_6.N Q_6.5 Q_6.6 Q_6.7 Q_6.8
NetD1_7_2: D1_7.2 J_7.N Q_7.5 Q_7.6 Q_7.7 Q_7.8 | length 3.8
  Top Layer w50: J_7.N@3866.22,1505.08 J_7.N@3868.9,1507.75
  other v1: 3960.79,1028.15 3804.84,1029.49 3883.58,1029.49 3921.42,1047.83 4000.16,1047.83 3844.21,1049.17 3960.79,1067.52 3804.84,1068.86 3883.58,1068.86 3921.42,1087.2 4000.16,1087.2 3844.21,1088.54 3960.79,1106.89 3804.84,1108.23 3883.58,1108.23 3921.42,1126.57 4000.16,1126.57 3844.21,1127.91 3960.79,1146.26 3804.84,1147.6 3883.58,1147.6 3921.42,1165.94 4000.16,1165.94 3844.21,1167.28 3960.79,1185.63 3804.84,1186.97 3883.58,1186.97 3921.42,1205.31 4000.16,1205.31 3844.21,1206.65 3960.79,1225 3804.84,1226.34 3883.58,1226.34 3921.42,1244.68 4000.16,1244.68 3844.21,1246.02 3804.84,1265.71 3883.58,1265.71 3921.42,1303.74 3921.42,1343.11 3960.79,1362.8 3921.42,1382.48 4000.16,1382.48 3960.79,1402.17 3804.84,1403.5 3844.21,1403.5 3883.58,1403.5 3921.42,1421.85 4000.16,1421.85 3960.79,1441.54 3785.16,1442.87 3824.53,1442.87 4000.16,1461.22 3960.79,1480.91 3785.16,1482.24 4000.16,1500.59 3960.79,1520.28 3785.16,1521.61 4000.16,1539.96 3960.79,1559.65 3785.16,1560.98 3872.2,1579.33 4000.16,1579.33 3824.53,1580.67 3785.16,1600.35 3785.16,1639.72 3785.16,1679.09
NetLED1_1: LED1.1 RL1.1 | length 71
  Top Layer w27.56: RL1.1@3179.29,1087.72 LED1.1@3250.32,1087.72
NetLED2_1: LED2.1 RL2.1 | length 78.7
  Top Layer w27.56: LED2.1@3336.77,1087.72 RL2.1@3415.51,1087.72
NetQ_1_4: Q_1.4 R1_1.2 R2_1.2 | length 5.7
  Top Layer w10: 2043.31,2626.18 R2_1.2@2047.24,2622.25
  Top Layer w27.56: 2043.23,2626.26 2043.31,2626.18
NetQ_2_4: Q_2.4 R1_2.2 R2_2.2 | length 5.7
  Top Layer w10: 2637.8,2616.09 R2_2.2@2641.73,2612.16
  Top Layer w27.56: 2637.72,2616.17 2637.8,2616.09
NetQ_3_4: Q_3.4 R1_3.2 R2_3.2 | length 5.7
  Top Layer w10: 3455.59,2632.36 R2_3.2@3459.53,2628.43
  Top Layer w27.56: 3455.51,2632.44 3455.59,2632.36
NetQ_4_4: Q_4.4 R1_4.2 R2_4.2 | length 5.7
  Top Layer w10: R2_4.2@1531.5,1835.43 1535.43,1831.49
  Top Layer w27.56: 1535.43,1831.49 1535.51,1831.42
NetQ_5_4: Q_5.4 R1_5.2 R2_5.2 | length 5.7
  Top Layer w10: R2_5.2@2119.76,1838.88 2123.7,1834.94
  Top Layer w27.56: 2123.7,1834.94 2123.78,1834.86
NetQ_6_4: Q_6.4 R1_6.2 R2_6.2
NetQ_7_4: Q_7.4 R1_7.2 R2_7.2 | length 5.7
  Top Layer w10: R2_7.2@3838.74,1820.27 3842.68,1816.34
  Top Layer w27.56: 3842.68,1816.34 3842.76,1816.26
NetR1_1_1: R1_1.1 U_1.5 | length 1.2
  Top Layer w20: U_1.5@1903.07,2555.07 U_1.5@1903.95,2554.2
NetR1_2_1: R1_2.1 U_2.5 | length 1.2
  Top Layer w20: U_2.5@2497.56,2544.98 U_2.5@2498.43,2544.11
NetR1_3_1: R1_3.1 U_3.5 | length 1.2
  Top Layer w20: U_3.5@3315.35,2561.25 U_3.5@3316.23,2560.38
NetR1_4_1: R1_4.1 U_4.5 | length 1.2
  Top Layer w20: U_4.5@1674.8,1903.48 U_4.5@1675.67,1902.61
NetR1_5_1: R1_5.1 U_5.5 | length 1.2
  Top Layer w20: U_5.5@2263.06,1906.93 U_5.5@2263.94,1906.05
NetR1_6_1: R1_6.1 U_6.5
NetR1_7_1: R1_7.1 U_7.5 | length 1.2
  Top Layer w20: U_7.5@3982.04,1888.32 U_7.5@3982.91,1887.45
S0: "HORIZ Cable.4" HORIZ.4 U_5.3 | length 540.6
  Top Layer w10: 2044.96,2074.31 2076.46,2042.82 2177.21,2042.82 2183.06,2036.96 2183.06,2020.93 U_5.3@2189.06,2014.93 ; 4074.8,2274.57 4124.96,2274.57 4163.39,2312.99 4163.39,2442.91 4253.94,2533.46
S1: "HORIZ Cable.5" HORIZ.5 U_6.3 | length 595.8
  Top Layer w10: U_6.3@2955,1641.29 U_6.3@2957.81,1644.1 ; 4074.8,2254.57 4134.49,2254.57 4183.39,2303.46 4183.39,2364.49 4253.94,2435.04
  Bottom Layer w20: HORIZ.5@2784.33,1825.51 2967,1642.84 v2(2967,1599)
  other v2: 2900,1598 2934,1616